# EAGLE board ISL29125 Breakout-Panel-v10 (EAGLE 6.5.0), part 1 of 2
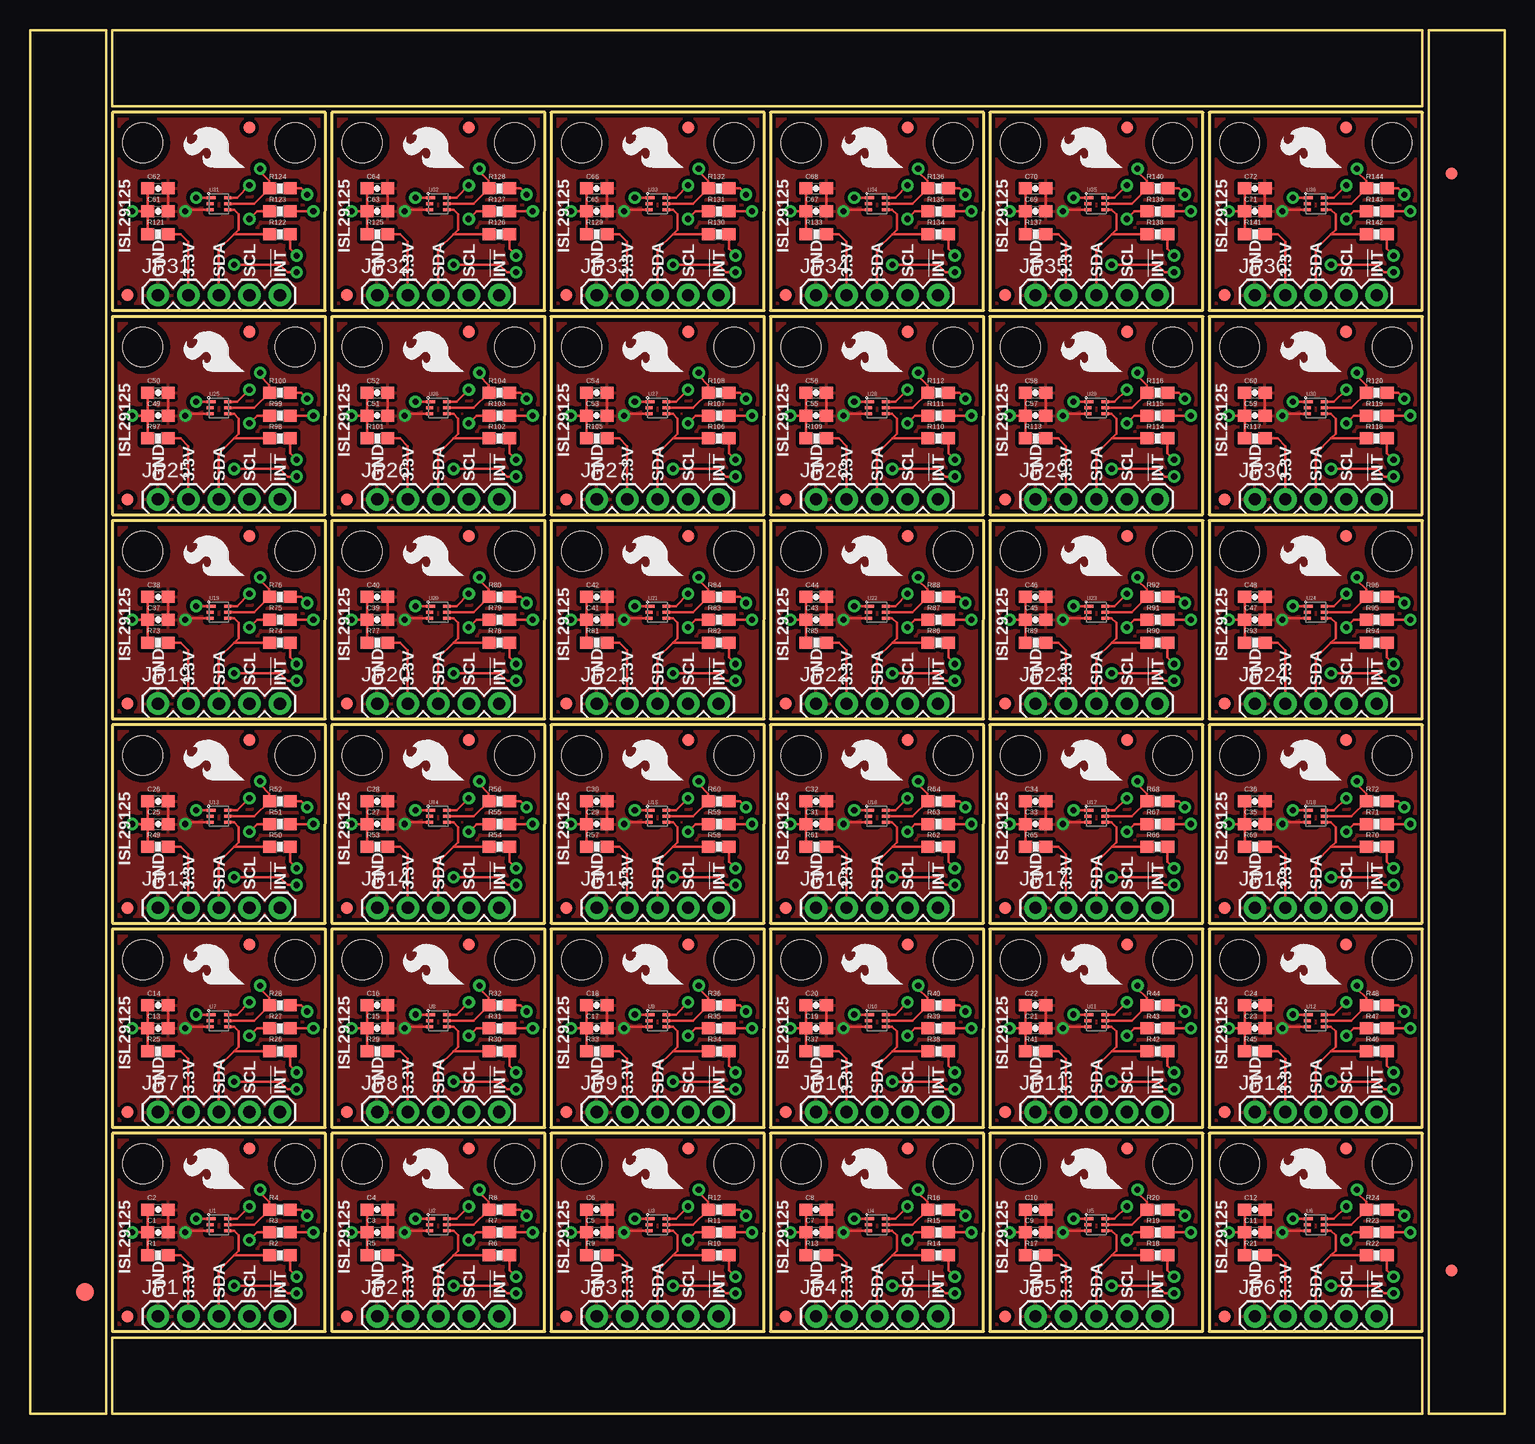
[diagram p0: board, top side]
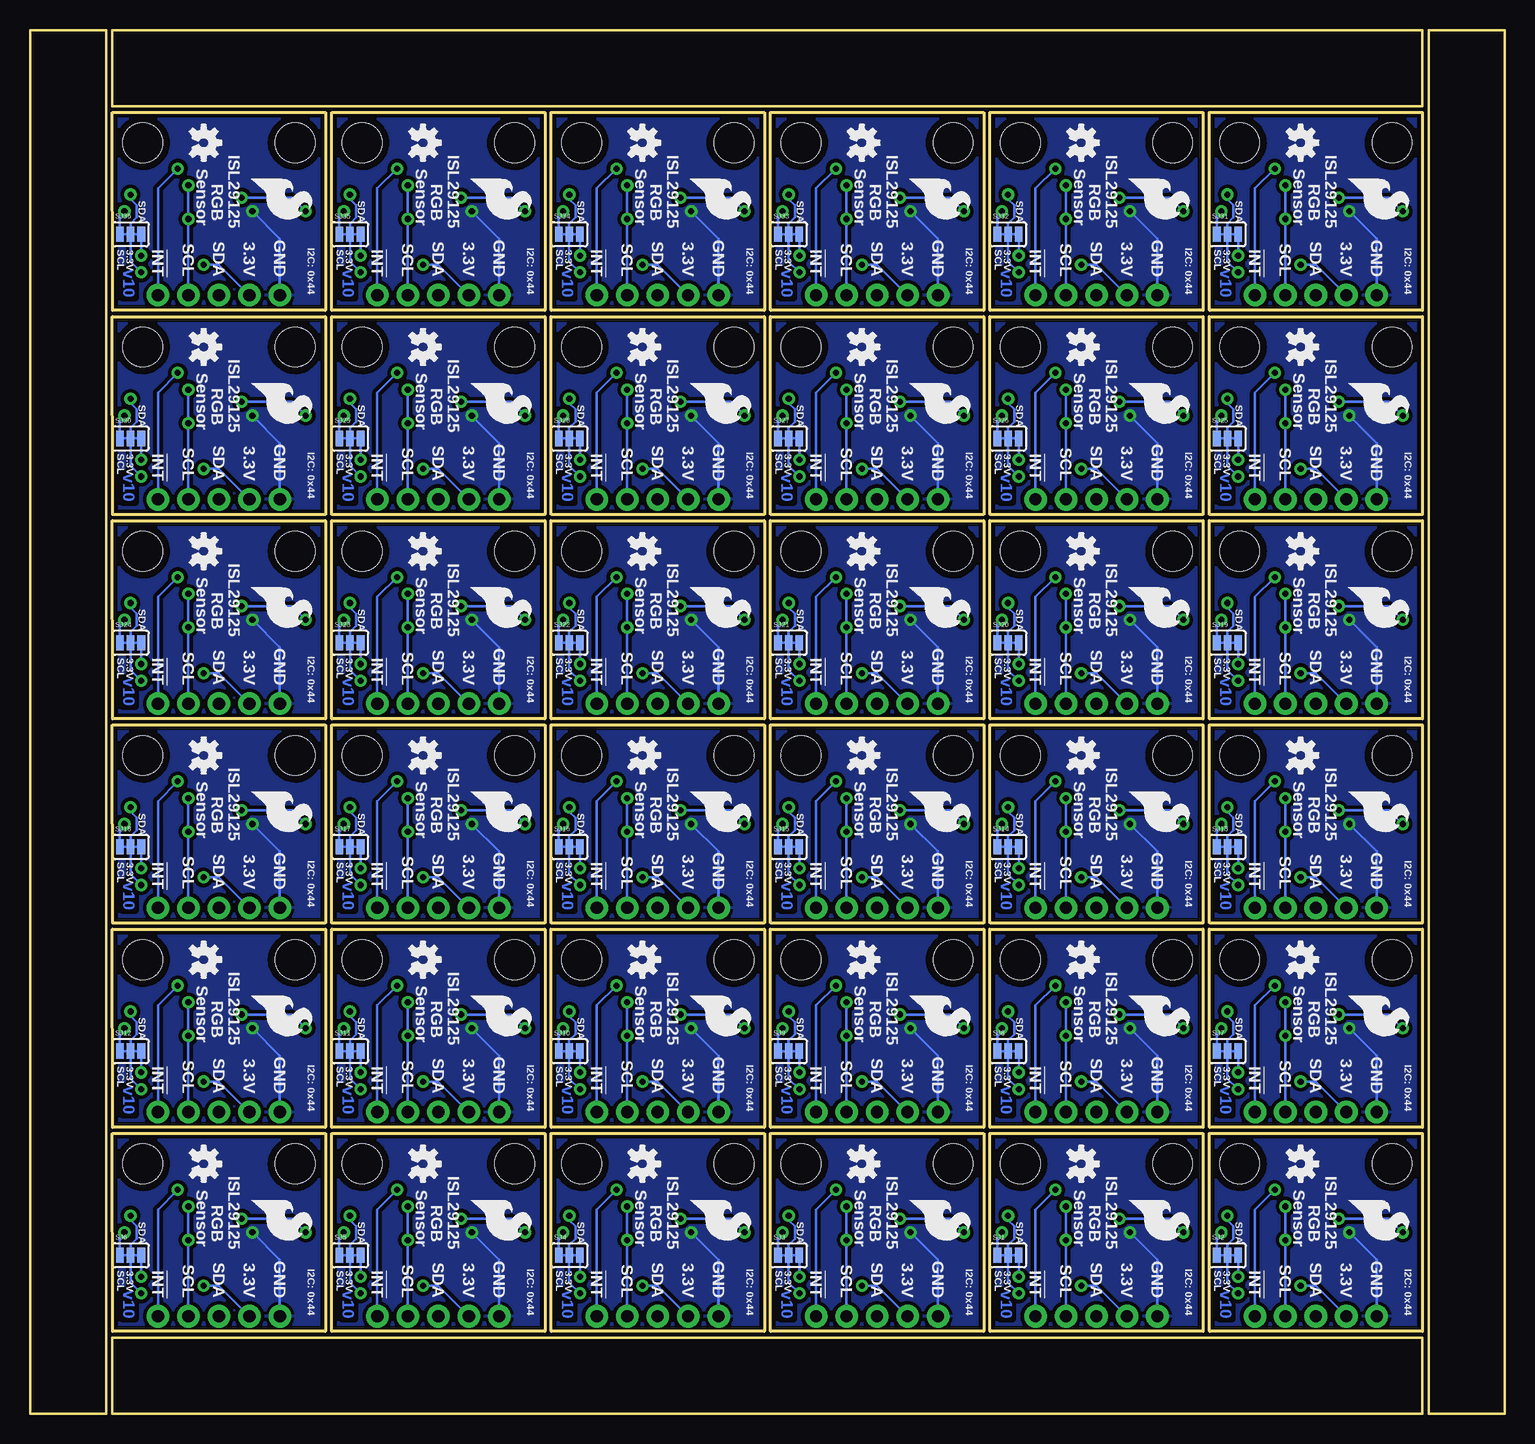
[diagram p1: board, bottom side, seen from below]

Size 122.94 x 115.32 mm. Coordinates in mm from the lower left corner, seen from the top.
Outline: 160 segments
Copper layers (1*16): Top 0.035mm / dielectric 1.5mm / Bottom 0.035mm
Design rules "SparkFun": minimum track width 8mil, minimum drill 20mil, track to track 8mil, track to pad 8mil, pad to pad 8mil, via to via 8mil, smd to smd 8mil, copper to edge 8mil, drill to drill 8mil, minimum pad ring 12mil, minimum via ring 10mil, stop-mask expansion 4mil, vias tented up to drill 20mil, thermal gap 10mil
tRestrict: area 14.7,15 to 15.7,15.1; area 33,15 to 34,15.1; area 51.3,15 to 52.3,15.1; area 69.6,15 to 70.6,15.1; area 87.9,15 to 88.9,15.1; area 106.2,15 to 107.2,15.1; area 14.7,32 to 15.7,32.1; area 33,32 to 34,32.1; area 51.3,32 to 52.3,32.1; area 69.6,32 to 70.6,32.1; area 87.9,32 to 88.9,32.1; area 106.2,32 to 107.2,32.1; 24 more areas

## Footprints (pad centres in the part's own frame; a part is rotated, then mirrored left to right if it is on the bottom)
0603-CAP = smd 1.1 x 1: 1 -0.85,0; 2 0.85,0
FIDUCIAL-1.5X3 = smd 1.5 x 1.5: 1 0,0
FIDUCIAL-1X2 = smd 1 x 1: 1 0,0
1X05 = drill 1.016 pad 1.88: 1 0,0; 2 2.54,0; 3 5.08,0; 4 7.62,0; 5 10.16,0
0603-RES = smd 1.1 x 1: 1 -0.85,0; 2 0.85,0
SJ_3 = smd 0.635 x 1.27: 1 -0.889,0; 2 0,0; 3 0.889,0
STAND-OFF = hole 3.302: 0,0
ODFN-LD-6 = smd 0.75 x 0.25: 1 -0.645,0.5 | smd 0.6 x 0.25: 2 -0.72,0; 3 -0.72,-0.5; 4 0.72,-0.5; 5 0.72,0; 6 0.72,0.5

## Placement (x,y rotation side)
C1  0.1uF  [0603-CAP]  10.67,15.11 0 top
C2  1.0uF  [0603-CAP]  10.67,17.02 0 top
C3  0.1uF  [0603-CAP]  28.96,15.11 0 top
C4  1.0uF  [0603-CAP]  28.96,17.02 0 top
C5  0.1uF  [0603-CAP]  47.24,15.11 0 top
C6  1.0uF  [0603-CAP]  47.24,17.02 0 top
C7  0.1uF  [0603-CAP]  65.53,15.11 0 top
C8  1.0uF  [0603-CAP]  65.53,17.02 0 top
C9  0.1uF  [0603-CAP]  83.82,15.11 0 top
C10  1.0uF  [0603-CAP]  83.82,17.02 0 top
C11  0.1uF  [0603-CAP]  102.11,15.11 0 top
C12  1.0uF  [0603-CAP]  102.11,17.02 0 top
C13  0.1uF  [0603-CAP]  10.67,32.13 0 top
C14  1.0uF  [0603-CAP]  10.67,34.04 0 top
C15  0.1uF  [0603-CAP]  28.96,32.13 0 top
C16  1.0uF  [0603-CAP]  28.96,34.04 0 top
C17  0.1uF  [0603-CAP]  47.24,32.13 0 top
C18  1.0uF  [0603-CAP]  47.24,34.04 0 top
C19  0.1uF  [0603-CAP]  65.53,32.13 0 top
C20  1.0uF  [0603-CAP]  65.53,34.04 0 top
C21  0.1uF  [0603-CAP]  83.82,32.13 0 top
C22  1.0uF  [0603-CAP]  83.82,34.04 0 top
C23  0.1uF  [0603-CAP]  102.11,32.13 0 top
C24  1.0uF  [0603-CAP]  102.11,34.04 0 top
C25  0.1uF  [0603-CAP]  10.67,49.15 0 top
C26  1.0uF  [0603-CAP]  10.67,51.05 0 top
C27  0.1uF  [0603-CAP]  28.96,49.15 0 top
C28  1.0uF  [0603-CAP]  28.96,51.05 0 top
C29  0.1uF  [0603-CAP]  47.24,49.15 0 top
C30  1.0uF  [0603-CAP]  47.24,51.05 0 top
C31  0.1uF  [0603-CAP]  65.53,49.15 0 top
C32  1.0uF  [0603-CAP]  65.53,51.05 0 top
C33  0.1uF  [0603-CAP]  83.82,49.15 0 top
C34  1.0uF  [0603-CAP]  83.82,51.05 0 top
C35  0.1uF  [0603-CAP]  102.11,49.15 0 top
C36  1.0uF  [0603-CAP]  102.11,51.05 0 top
C37  0.1uF  [0603-CAP]  10.67,66.17 0 top
C38  1.0uF  [0603-CAP]  10.67,68.07 0 top
C39  0.1uF  [0603-CAP]  28.96,66.17 0 top
C40  1.0uF  [0603-CAP]  28.96,68.07 0 top
C41  0.1uF  [0603-CAP]  47.24,66.17 0 top
C42  1.0uF  [0603-CAP]  47.24,68.07 0 top
C43  0.1uF  [0603-CAP]  65.53,66.17 0 top
C44  1.0uF  [0603-CAP]  65.53,68.07 0 top
C45  0.1uF  [0603-CAP]  83.82,66.17 0 top
C46  1.0uF  [0603-CAP]  83.82,68.07 0 top
C47  0.1uF  [0603-CAP]  102.11,66.17 0 top
C48  1.0uF  [0603-CAP]  102.11,68.07 0 top
C49  0.1uF  [0603-CAP]  10.67,83.19 0 top
C50  1.0uF  [0603-CAP]  10.67,85.09 0 top
C51  0.1uF  [0603-CAP]  28.96,83.19 0 top
C52  1.0uF  [0603-CAP]  28.96,85.09 0 top
C53  0.1uF  [0603-CAP]  47.24,83.19 0 top
C54  1.0uF  [0603-CAP]  47.24,85.09 0 top
C55  0.1uF  [0603-CAP]  65.53,83.19 0 top
C56  1.0uF  [0603-CAP]  65.53,85.09 0 top
C57  0.1uF  [0603-CAP]  83.82,83.19 0 top
C58  1.0uF  [0603-CAP]  83.82,85.09 0 top
C59  0.1uF  [0603-CAP]  102.11,83.19 0 top
C60  1.0uF  [0603-CAP]  102.11,85.09 0 top
C61  0.1uF  [0603-CAP]  10.67,100.2 0 top
C62  1.0uF  [0603-CAP]  10.67,102.11 0 top
C63  0.1uF  [0603-CAP]  28.96,100.2 0 top
C64  1.0uF  [0603-CAP]  28.96,102.11 0 top
C65  0.1uF  [0603-CAP]  47.24,100.2 0 top
C66  1.0uF  [0603-CAP]  47.24,102.11 0 top
C67  0.1uF  [0603-CAP]  65.53,100.2 0 top
C68  1.0uF  [0603-CAP]  65.53,102.11 0 top
C69  0.1uF  [0603-CAP]  83.82,100.2 0 top
C70  1.0uF  [0603-CAP]  83.82,102.11 0 top
C71  0.1uF  [0603-CAP]  102.11,100.2 0 top
C72  1.0uF  [0603-CAP]  102.11,102.11 0 top
E$1  [FIDUCIAL-1.5X3]  4.57,10.16 0 top
E$4  [FIDUCIAL-1X2]  118.49,11.94 0 top
E$6  [FIDUCIAL-1X2]  118.49,103.38 180 top
FID1  FIDUCIAL1X2  [FIDUCIAL-1X2]  18.29,22.1 0 top
FID2  FIDUCIAL1X2  [FIDUCIAL-1X2]  8.13,8.13 0 top
FID3  FIDUCIAL1X2  [FIDUCIAL-1X2]  36.58,22.1 0 top
FID4  FIDUCIAL1X2  [FIDUCIAL-1X2]  26.42,8.13 0 top
FID5  FIDUCIAL1X2  [FIDUCIAL-1X2]  54.86,22.1 0 top
FID6  FIDUCIAL1X2  [FIDUCIAL-1X2]  44.7,8.13 0 top
FID7  FIDUCIAL1X2  [FIDUCIAL-1X2]  73.15,22.1 0 top
FID8  FIDUCIAL1X2  [FIDUCIAL-1X2]  62.99,8.13 0 top
FID9  FIDUCIAL1X2  [FIDUCIAL-1X2]  91.44,22.1 0 top
FID10  FIDUCIAL1X2  [FIDUCIAL-1X2]  81.28,8.13 0 top
FID11  FIDUCIAL1X2  [FIDUCIAL-1X2]  109.73,22.1 0 top
FID12  FIDUCIAL1X2  [FIDUCIAL-1X2]  99.57,8.13 0 top
FID13  FIDUCIAL1X2  [FIDUCIAL-1X2]  18.29,39.12 0 top
FID14  FIDUCIAL1X2  [FIDUCIAL-1X2]  8.13,25.15 0 top
FID15  FIDUCIAL1X2  [FIDUCIAL-1X2]  36.58,39.12 0 top
FID16  FIDUCIAL1X2  [FIDUCIAL-1X2]  26.42,25.15 0 top
FID17  FIDUCIAL1X2  [FIDUCIAL-1X2]  54.86,39.12 0 top
FID18  FIDUCIAL1X2  [FIDUCIAL-1X2]  44.7,25.15 0 top
FID19  FIDUCIAL1X2  [FIDUCIAL-1X2]  73.15,39.12 0 top
FID20  FIDUCIAL1X2  [FIDUCIAL-1X2]  62.99,25.15 0 top
FID21  FIDUCIAL1X2  [FIDUCIAL-1X2]  91.44,39.12 0 top
FID22  FIDUCIAL1X2  [FIDUCIAL-1X2]  81.28,25.15 0 top
FID23  FIDUCIAL1X2  [FIDUCIAL-1X2]  109.73,39.12 0 top
FID24  FIDUCIAL1X2  [FIDUCIAL-1X2]  99.57,25.15 0 top
FID25  FIDUCIAL1X2  [FIDUCIAL-1X2]  18.29,56.13 0 top
FID26  FIDUCIAL1X2  [FIDUCIAL-1X2]  8.13,42.16 0 top
FID27  FIDUCIAL1X2  [FIDUCIAL-1X2]  36.58,56.13 0 top
FID28  FIDUCIAL1X2  [FIDUCIAL-1X2]  26.42,42.16 0 top
FID29  FIDUCIAL1X2  [FIDUCIAL-1X2]  54.86,56.13 0 top
FID30  FIDUCIAL1X2  [FIDUCIAL-1X2]  44.7,42.16 0 top
FID31  FIDUCIAL1X2  [FIDUCIAL-1X2]  73.15,56.13 0 top
FID32  FIDUCIAL1X2  [FIDUCIAL-1X2]  62.99,42.16 0 top
FID33  FIDUCIAL1X2  [FIDUCIAL-1X2]  91.44,56.13 0 top
FID34  FIDUCIAL1X2  [FIDUCIAL-1X2]  81.28,42.16 0 top
FID35  FIDUCIAL1X2  [FIDUCIAL-1X2]  109.73,56.13 0 top
FID36  FIDUCIAL1X2  [FIDUCIAL-1X2]  99.57,42.16 0 top
FID37  FIDUCIAL1X2  [FIDUCIAL-1X2]  18.29,73.15 0 top
FID38  FIDUCIAL1X2  [FIDUCIAL-1X2]  8.13,59.18 0 top
FID39  FIDUCIAL1X2  [FIDUCIAL-1X2]  36.58,73.15 0 top
FID40  FIDUCIAL1X2  [FIDUCIAL-1X2]  26.42,59.18 0 top
FID41  FIDUCIAL1X2  [FIDUCIAL-1X2]  54.86,73.15 0 top
FID42  FIDUCIAL1X2  [FIDUCIAL-1X2]  44.7,59.18 0 top
FID43  FIDUCIAL1X2  [FIDUCIAL-1X2]  73.15,73.15 0 top
FID44  FIDUCIAL1X2  [FIDUCIAL-1X2]  62.99,59.18 0 top
FID45  FIDUCIAL1X2  [FIDUCIAL-1X2]  91.44,73.15 0 top
FID46  FIDUCIAL1X2  [FIDUCIAL-1X2]  81.28,59.18 0 top
FID47  FIDUCIAL1X2  [FIDUCIAL-1X2]  109.73,73.15 0 top
FID48  FIDUCIAL1X2  [FIDUCIAL-1X2]  99.57,59.18 0 top
FID49  FIDUCIAL1X2  [FIDUCIAL-1X2]  18.29,90.17 0 top
FID50  FIDUCIAL1X2  [FIDUCIAL-1X2]  8.13,76.2 0 top
FID51  FIDUCIAL1X2  [FIDUCIAL-1X2]  36.58,90.17 0 top
FID52  FIDUCIAL1X2  [FIDUCIAL-1X2]  26.42,76.2 0 top
FID53  FIDUCIAL1X2  [FIDUCIAL-1X2]  54.86,90.17 0 top
FID54  FIDUCIAL1X2  [FIDUCIAL-1X2]  44.7,76.2 0 top
FID55  FIDUCIAL1X2  [FIDUCIAL-1X2]  73.15,90.17 0 top
FID56  FIDUCIAL1X2  [FIDUCIAL-1X2]  62.99,76.2 0 top
FID57  FIDUCIAL1X2  [FIDUCIAL-1X2]  91.44,90.17 0 top
FID58  FIDUCIAL1X2  [FIDUCIAL-1X2]  81.28,76.2 0 top
FID59  FIDUCIAL1X2  [FIDUCIAL-1X2]  109.73,90.17 0 top
FID60  FIDUCIAL1X2  [FIDUCIAL-1X2]  99.57,76.2 0 top
FID61  FIDUCIAL1X2  [FIDUCIAL-1X2]  18.29,107.19 0 top
FID62  FIDUCIAL1X2  [FIDUCIAL-1X2]  8.13,93.22 0 top
FID63  FIDUCIAL1X2  [FIDUCIAL-1X2]  36.58,107.19 0 top
FID64  FIDUCIAL1X2  [FIDUCIAL-1X2]  26.42,93.22 0 top
FID65  FIDUCIAL1X2  [FIDUCIAL-1X2]  54.86,107.19 0 top
FID66  FIDUCIAL1X2  [FIDUCIAL-1X2]  44.7,93.22 0 top
FID67  FIDUCIAL1X2  [FIDUCIAL-1X2]  73.15,107.19 0 top
FID68  FIDUCIAL1X2  [FIDUCIAL-1X2]  62.99,93.22 0 top
FID69  FIDUCIAL1X2  [FIDUCIAL-1X2]  91.44,107.19 0 top
FID70  FIDUCIAL1X2  [FIDUCIAL-1X2]  81.28,93.22 0 top
FID71  FIDUCIAL1X2  [FIDUCIAL-1X2]  109.73,107.19 0 top
FID72  FIDUCIAL1X2  [FIDUCIAL-1X2]  99.57,93.22 0 top
JP1  [1X05]  10.67,8.13 0 top
JP2  [1X05]  28.96,8.13 0 top
JP3  [1X05]  47.24,8.13 0 top
JP4  [1X05]  65.53,8.13 0 top
JP5  [1X05]  83.82,8.13 0 top
JP6  [1X05]  102.11,8.13 0 top
JP7  [1X05]  10.67,25.15 0 top
JP8  [1X05]  28.96,25.15 0 top
JP9  [1X05]  47.24,25.15 0 top
JP10  [1X05]  65.53,25.15 0 top
JP11  [1X05]  83.82,25.15 0 top
JP12  [1X05]  102.11,25.15 0 top
JP13  [1X05]  10.67,42.16 0 top
JP14  [1X05]  28.96,42.16 0 top
JP15  [1X05]  47.24,42.16 0 top
JP16  [1X05]  65.53,42.16 0 top
JP17  [1X05]  83.82,42.16 0 top
JP18  [1X05]  102.11,42.16 0 top
JP19  [1X05]  10.67,59.18 0 top
JP20  [1X05]  28.96,59.18 0 top
JP21  [1X05]  47.24,59.18 0 top
JP22  [1X05]  65.53,59.18 0 top
JP23  [1X05]  83.82,59.18 0 top
JP24  [1X05]  102.11,59.18 0 top
JP25  [1X05]  10.67,76.2 0 top
JP26  [1X05]  28.96,76.2 0 top
JP27  [1X05]  47.24,76.2 0 top
JP28  [1X05]  65.53,76.2 0 top
JP29  [1X05]  83.82,76.2 0 top
JP30  [1X05]  102.11,76.2 0 top
JP31  [1X05]  10.67,93.22 0 top
JP32  [1X05]  28.96,93.22 0 top
JP33  [1X05]  47.24,93.22 0 top
JP34  [1X05]  65.53,93.22 0 top
JP35  [1X05]  83.82,93.22 0 top
JP36  [1X05]  102.11,93.22 0 top
LOGO1  OSHW-LOGOS  [OSHW-LOGO-S]  35.31,20.83 270 bottom
LOGO2  SFE_LOGO_FLAME.2_INCH  [SFE_LOGO_FLAME_.2]  13.34,18.16 270 bottom
LOGO3  OSHW-LOGOS  [OSHW-LOGO-S]  17.02,20.83 270 bottom
LOGO4  SFE_LOGO_FLAME.2_INCH  [SFE_LOGO_FLAME_.2]  18.16,18.41 90 top
LOGO5  SFE_LOGO_FLAME.2_INCH  [SFE_LOGO_FLAME_.2]  36.45,18.41 90 top
LOGO6  SFE_LOGO_FLAME.2_INCH  [SFE_LOGO_FLAME_.2]  31.62,18.16 270 bottom
LOGO7  OSHW-LOGOS  [OSHW-LOGO-S]  53.59,20.83 270 bottom
LOGO8  SFE_LOGO_FLAME.2_INCH  [SFE_LOGO_FLAME_.2]  54.74,18.41 90 top
LOGO9  SFE_LOGO_FLAME.2_INCH  [SFE_LOGO_FLAME_.2]  49.91,18.16 270 bottom
LOGO10  OSHW-LOGOS  [OSHW-LOGO-S]  71.88,20.83 270 bottom
LOGO11  SFE_LOGO_FLAME.2_INCH  [SFE_LOGO_FLAME_.2]  73.03,18.41 90 top
LOGO12  SFE_LOGO_FLAME.2_INCH  [SFE_LOGO_FLAME_.2]  68.2,18.16 270 bottom
LOGO13  OSHW-LOGOS  [OSHW-LOGO-S]  90.17,20.83 270 bottom
LOGO14  SFE_LOGO_FLAME.2_INCH  [SFE_LOGO_FLAME_.2]  91.31,18.41 90 top
LOGO15  SFE_LOGO_FLAME.2_INCH  [SFE_LOGO_FLAME_.2]  86.49,18.16 270 bottom
LOGO16  OSHW-LOGOS  [OSHW-LOGO-S]  108.46,20.83 270 bottom
LOGO17  SFE_LOGO_FLAME.2_INCH  [SFE_LOGO_FLAME_.2]  109.6,18.41 90 top
LOGO18  SFE_LOGO_FLAME.2_INCH  [SFE_LOGO_FLAME_.2]  104.78,18.16 270 bottom
LOGO19  OSHW-LOGOS  [OSHW-LOGO-S]  17.02,37.85 270 bottom
LOGO20  SFE_LOGO_FLAME.2_INCH  [SFE_LOGO_FLAME_.2]  18.16,35.43 90 top
LOGO21  SFE_LOGO_FLAME.2_INCH  [SFE_LOGO_FLAME_.2]  13.34,35.18 270 bottom
LOGO22  OSHW-LOGOS  [OSHW-LOGO-S]  35.31,37.85 270 bottom
LOGO23  SFE_LOGO_FLAME.2_INCH  [SFE_LOGO_FLAME_.2]  36.45,35.43 90 top
LOGO24  SFE_LOGO_FLAME.2_INCH  [SFE_LOGO_FLAME_.2]  31.62,35.18 270 bottom
LOGO25  OSHW-LOGOS  [OSHW-LOGO-S]  53.59,37.85 270 bottom
LOGO26  SFE_LOGO_FLAME.2_INCH  [SFE_LOGO_FLAME_.2]  54.74,35.43 90 top
LOGO27  SFE_LOGO_FLAME.2_INCH  [SFE_LOGO_FLAME_.2]  49.91,35.18 270 bottom
LOGO28  OSHW-LOGOS  [OSHW-LOGO-S]  71.88,37.85 270 bottom
LOGO29  SFE_LOGO_FLAME.2_INCH  [SFE_LOGO_FLAME_.2]  73.03,35.43 90 top
LOGO30  SFE_LOGO_FLAME.2_INCH  [SFE_LOGO_FLAME_.2]  68.2,35.18 270 bottom
LOGO31  OSHW-LOGOS  [OSHW-LOGO-S]  90.17,37.85 270 bottom
LOGO32  SFE_LOGO_FLAME.2_INCH  [SFE_LOGO_FLAME_.2]  91.31,35.43 90 top
LOGO33  SFE_LOGO_FLAME.2_INCH  [SFE_LOGO_FLAME_.2]  86.49,35.18 270 bottom
LOGO34  OSHW-LOGOS  [OSHW-LOGO-S]  108.46,37.85 270 bottom
LOGO35  SFE_LOGO_FLAME.2_INCH  [SFE_LOGO_FLAME_.2]  109.6,35.43 90 top
LOGO36  SFE_LOGO_FLAME.2_INCH  [SFE_LOGO_FLAME_.2]  104.78,35.18 270 bottom
LOGO37  OSHW-LOGOS  [OSHW-LOGO-S]  17.02,54.86 270 bottom
LOGO38  SFE_LOGO_FLAME.2_INCH  [SFE_LOGO_FLAME_.2]  18.16,52.45 90 top
LOGO39  SFE_LOGO_FLAME.2_INCH  [SFE_LOGO_FLAME_.2]  13.34,52.2 270 bottom
LOGO40  OSHW-LOGOS  [OSHW-LOGO-S]  35.31,54.86 270 bottom
LOGO41  SFE_LOGO_FLAME.2_INCH  [SFE_LOGO_FLAME_.2]  36.45,52.45 90 top
LOGO42  SFE_LOGO_FLAME.2_INCH  [SFE_LOGO_FLAME_.2]  31.62,52.2 270 bottom
LOGO43  OSHW-LOGOS  [OSHW-LOGO-S]  53.59,54.86 270 bottom
LOGO44  SFE_LOGO_FLAME.2_INCH  [SFE_LOGO_FLAME_.2]  54.74,52.45 90 top
LOGO45  SFE_LOGO_FLAME.2_INCH  [SFE_LOGO_FLAME_.2]  49.91,52.2 270 bottom
LOGO46  OSHW-LOGOS  [OSHW-LOGO-S]  71.88,54.86 270 bottom
LOGO47  SFE_LOGO_FLAME.2_INCH  [SFE_LOGO_FLAME_.2]  73.03,52.45 90 top
LOGO48  SFE_LOGO_FLAME.2_INCH  [SFE_LOGO_FLAME_.2]  68.2,52.2 270 bottom
LOGO49  OSHW-LOGOS  [OSHW-LOGO-S]  90.17,54.86 270 bottom
LOGO50  SFE_LOGO_FLAME.2_INCH  [SFE_LOGO_FLAME_.2]  91.31,52.45 90 top
LOGO51  SFE_LOGO_FLAME.2_INCH  [SFE_LOGO_FLAME_.2]  86.49,52.2 270 bottom
LOGO52  OSHW-LOGOS  [OSHW-LOGO-S]  108.46,54.86 270 bottom
LOGO53  SFE_LOGO_FLAME.2_INCH  [SFE_LOGO_FLAME_.2]  109.6,52.45 90 top
LOGO54  SFE_LOGO_FLAME.2_INCH  [SFE_LOGO_FLAME_.2]  104.78,52.2 270 bottom
LOGO55  OSHW-LOGOS  [OSHW-LOGO-S]  17.02,71.88 270 bottom
LOGO56  SFE_LOGO_FLAME.2_INCH  [SFE_LOGO_FLAME_.2]  18.16,69.47 90 top
LOGO57  SFE_LOGO_FLAME.2_INCH  [SFE_LOGO_FLAME_.2]  13.34,69.22 270 bottom
LOGO58  OSHW-LOGOS  [OSHW-LOGO-S]  35.31,71.88 270 bottom
LOGO59  SFE_LOGO_FLAME.2_INCH  [SFE_LOGO_FLAME_.2]  36.45,69.47 90 top
LOGO60  SFE_LOGO_FLAME.2_INCH  [SFE_LOGO_FLAME_.2]  31.62,69.22 270 bottom
LOGO61  OSHW-LOGOS  [OSHW-LOGO-S]  53.59,71.88 270 bottom
LOGO62  SFE_LOGO_FLAME.2_INCH  [SFE_LOGO_FLAME_.2]  54.74,69.47 90 top
LOGO63  SFE_LOGO_FLAME.2_INCH  [SFE_LOGO_FLAME_.2]  49.91,69.22 270 bottom
LOGO64  OSHW-LOGOS  [OSHW-LOGO-S]  71.88,71.88 270 bottom
LOGO65  SFE_LOGO_FLAME.2_INCH  [SFE_LOGO_FLAME_.2]  73.03,69.47 90 top
LOGO66  SFE_LOGO_FLAME.2_INCH  [SFE_LOGO_FLAME_.2]  68.2,69.22 270 bottom
LOGO67  OSHW-LOGOS  [OSHW-LOGO-S]  90.17,71.88 270 bottom
LOGO68  SFE_LOGO_FLAME.2_INCH  [SFE_LOGO_FLAME_.2]  91.31,69.47 90 top
LOGO69  SFE_LOGO_FLAME.2_INCH  [SFE_LOGO_FLAME_.2]  86.49,69.22 270 bottom
LOGO70  OSHW-LOGOS  [OSHW-LOGO-S]  108.46,71.88 270 bottom
LOGO71  SFE_LOGO_FLAME.2_INCH  [SFE_LOGO_FLAME_.2]  109.6,69.47 90 top
LOGO72  SFE_LOGO_FLAME.2_INCH  [SFE_LOGO_FLAME_.2]  104.78,69.22 270 bottom
LOGO73  OSHW-LOGOS  [OSHW-LOGO-S]  17.02,88.9 270 bottom
LOGO74  SFE_LOGO_FLAME.2_INCH  [SFE_LOGO_FLAME_.2]  18.16,86.49 90 top
LOGO75  SFE_LOGO_FLAME.2_INCH  [SFE_LOGO_FLAME_.2]  13.34,86.23 270 bottom
LOGO76  OSHW-LOGOS  [OSHW-LOGO-S]  35.31,88.9 270 bottom
LOGO77  SFE_LOGO_FLAME.2_INCH  [SFE_LOGO_FLAME_.2]  36.45,86.49 90 top
LOGO78  SFE_LOGO_FLAME.2_INCH  [SFE_LOGO_FLAME_.2]  31.62,86.23 270 bottom
LOGO79  OSHW-LOGOS  [OSHW-LOGO-S]  53.59,88.9 270 bottom
LOGO80  SFE_LOGO_FLAME.2_INCH  [SFE_LOGO_FLAME_.2]  54.74,86.49 90 top
LOGO81  SFE_LOGO_FLAME.2_INCH  [SFE_LOGO_FLAME_.2]  49.91,86.23 270 bottom
LOGO82  OSHW-LOGOS  [OSHW-LOGO-S]  71.88,88.9 270 bottom
LOGO83  SFE_LOGO_FLAME.2_INCH  [SFE_LOGO_FLAME_.2]  73.03,86.49 90 top
LOGO84  SFE_LOGO_FLAME.2_INCH  [SFE_LOGO_FLAME_.2]  68.2,86.23 270 bottom
LOGO85  OSHW-LOGOS  [OSHW-LOGO-S]  90.17,88.9 270 bottom
LOGO86  SFE_LOGO_FLAME.2_INCH  [SFE_LOGO_FLAME_.2]  91.31,86.49 90 top
LOGO87  SFE_LOGO_FLAME.2_INCH  [SFE_LOGO_FLAME_.2]  86.49,86.23 270 bottom
LOGO88  OSHW-LOGOS  [OSHW-LOGO-S]  108.46,88.9 270 bottom
LOGO89  SFE_LOGO_FLAME.2_INCH  [SFE_LOGO_FLAME_.2]  109.6,86.49 90 top
LOGO90  SFE_LOGO_FLAME.2_INCH  [SFE_LOGO_FLAME_.2]  104.78,86.23 270 bottom
LOGO91  OSHW-LOGOS  [OSHW-LOGO-S]  17.02,105.92 270 bottom
LOGO92  SFE_LOGO_FLAME.2_INCH  [SFE_LOGO_FLAME_.2]  18.16,103.5 90 top
LOGO93  SFE_LOGO_FLAME.2_INCH  [SFE_LOGO_FLAME_.2]  13.34,103.25 270 bottom
LOGO94  OSHW-LOGOS  [OSHW-LOGO-S]  35.31,105.92 270 bottom
LOGO95  SFE_LOGO_FLAME.2_INCH  [SFE_LOGO_FLAME_.2]  36.45,103.5 90 top
LOGO96  SFE_LOGO_FLAME.2_INCH  [SFE_LOGO_FLAME_.2]  31.62,103.25 270 bottom
LOGO97  OSHW-LOGOS  [OSHW-LOGO-S]  53.59,105.92 270 bottom
LOGO98  SFE_LOGO_FLAME.2_INCH  [SFE_LOGO_FLAME_.2]  54.74,103.5 90 top
LOGO99  SFE_LOGO_FLAME.2_INCH  [SFE_LOGO_FLAME_.2]  49.91,103.25 270 bottom
LOGO100  OSHW-LOGOS  [OSHW-LOGO-S]  71.88,105.92 270 bottom
LOGO101  SFE_LOGO_FLAME.2_INCH  [SFE_LOGO_FLAME_.2]  73.03,103.5 90 top
LOGO102  SFE_LOGO_FLAME.2_INCH  [SFE_LOGO_FLAME_.2]  68.2,103.25 270 bottom
LOGO103  OSHW-LOGOS  [OSHW-LOGO-S]  90.17,105.92 270 bottom
LOGO104  SFE_LOGO_FLAME.2_INCH  [SFE_LOGO_FLAME_.2]  91.31,103.5 90 top
LOGO105  SFE_LOGO_FLAME.2_INCH  [SFE_LOGO_FLAME_.2]  86.49,103.25 270 bottom
LOGO106  OSHW-LOGOS  [OSHW-LOGO-S]  108.46,105.92 270 bottom
LOGO107  SFE_LOGO_FLAME.2_INCH  [SFE_LOGO_FLAME_.2]  109.6,103.5 90 top
LOGO108  SFE_LOGO_FLAME.2_INCH  [SFE_LOGO_FLAME_.2]  104.78,103.25 270 bottom
R1  100  [0603-RES]  10.67,13.21 0 top
R2  10K  [0603-RES]  20.83,13.21 0 top
R3  10K  [0603-RES]  20.83,15.11 0 top
R4  10K  [0603-RES]  20.83,17.02 0 top
R5  100  [0603-RES]  28.96,13.21 0 top
R6  10K  [0603-RES]  39.12,13.21 0 top
R7  10K  [0603-RES]  39.12,15.11 0 top
R8  10K  [0603-RES]  39.12,17.02 0 top
R9  100  [0603-RES]  47.24,13.21 0 top
R10  10K  [0603-RES]  57.4,13.21 0 top
R11  10K  [0603-RES]  57.4,15.11 0 top
R12  10K  [0603-RES]  57.4,17.02 0 top
R13  100  [0603-RES]  65.53,13.21 0 top
R14  10K  [0603-RES]  75.69,13.21 0 top
R15  10K  [0603-RES]  75.69,15.11 0 top
R16  10K  [0603-RES]  75.69,17.02 0 top
R17  100  [0603-RES]  83.82,13.21 0 top
R18  10K  [0603-RES]  93.98,13.21 0 top
R19  10K  [0603-RES]  93.98,15.11 0 top
R20  10K  [0603-RES]  93.98,17.02 0 top
R21  100  [0603-RES]  102.11,13.21 0 top
R22  10K  [0603-RES]  112.27,13.21 0 top
R23  10K  [0603-RES]  112.27,15.11 0 top
R24  10K  [0603-RES]  112.27,17.02 0 top
R25  100  [0603-RES]  10.67,30.23 0 top
R26  10K  [0603-RES]  20.83,30.23 0 top
R27  10K  [0603-RES]  20.83,32.13 0 top
R28  10K  [0603-RES]  20.83,34.04 0 top
R29  100  [0603-RES]  28.96,30.23 0 top
R30  10K  [0603-RES]  39.12,30.23 0 top
R31  10K  [0603-RES]  39.12,32.13 0 top
R32  10K  [0603-RES]  39.12,34.04 0 top
R33  100  [0603-RES]  47.24,30.23 0 top
R34  10K  [0603-RES]  57.4,30.23 0 top
R35  10K  [0603-RES]  57.4,32.13 0 top
R36  10K  [0603-RES]  57.4,34.04 0 top
R37  100  [0603-RES]  65.53,30.23 0 top
R38  10K  [0603-RES]  75.69,30.23 0 top
R39  10K  [0603-RES]  75.69,32.13 0 top
R40  10K  [0603-RES]  75.69,34.04 0 top
R41  100  [0603-RES]  83.82,30.23 0 top
R42  10K  [0603-RES]  93.98,30.23 0 top
R43  10K  [0603-RES]  93.98,32.13 0 top
R44  10K  [0603-RES]  93.98,34.04 0 top
R45  100  [0603-RES]  102.11,30.23 0 top
R46  10K  [0603-RES]  112.27,30.23 0 top
R47  10K  [0603-RES]  112.27,32.13 0 top
R48  10K  [0603-RES]  112.27,34.04 0 top
R49  100  [0603-RES]  10.67,47.24 0 top
R50  10K  [0603-RES]  20.83,47.24 0 top
R51  10K  [0603-RES]  20.83,49.15 0 top
R52  10K  [0603-RES]  20.83,51.05 0 top
R53  100  [0603-RES]  28.96,47.24 0 top
R54  10K  [0603-RES]  39.12,47.24 0 top
R55  10K  [0603-RES]  39.12,49.15 0 top
R56  10K  [0603-RES]  39.12,51.05 0 top
R57  100  [0603-RES]  47.24,47.24 0 top
R58  10K  [0603-RES]  57.4,47.24 0 top
R59  10K  [0603-RES]  57.4,49.15 0 top
R60  10K  [0603-RES]  57.4,51.05 0 top
R61  100  [0603-RES]  65.53,47.24 0 top
R62  10K  [0603-RES]  75.69,47.24 0 top
R63  10K  [0603-RES]  75.69,49.15 0 top
R64  10K  [0603-RES]  75.69,51.05 0 top
R65  100  [0603-RES]  83.82,47.24 0 top
R66  10K  [0603-RES]  93.98,47.24 0 top
R67  10K  [0603-RES]  93.98,49.15 0 top
R68  10K  [0603-RES]  93.98,51.05 0 top
R69  100  [0603-RES]  102.11,47.24 0 top
R70  10K  [0603-RES]  112.27,47.24 0 top
R71  10K  [0603-RES]  112.27,49.15 0 top
R72  10K  [0603-RES]  112.27,51.05 0 top
R73  100  [0603-RES]  10.67,64.26 0 top
R74  10K  [0603-RES]  20.83,64.26 0 top
R75  10K  [0603-RES]  20.83,66.17 0 top
R76  10K  [0603-RES]  20.83,68.07 0 top
R77  100  [0603-RES]  28.96,64.26 0 top
R78  10K  [0603-RES]  39.12,64.26 0 top
R79  10K  [0603-RES]  39.12,66.17 0 top
R80  10K  [0603-RES]  39.12,68.07 0 top
R81  100  [0603-RES]  47.24,64.26 0 top
R82  10K  [0603-RES]  57.4,64.26 0 top
R83  10K  [0603-RES]  57.4,66.17 0 top
R84  10K  [0603-RES]  57.4,68.07 0 top
R85  100  [0603-RES]  65.53,64.26 0 top
R86  10K  [0603-RES]  75.69,64.26 0 top
R87  10K  [0603-RES]  75.69,66.17 0 top
R88  10K  [0603-RES]  75.69,68.07 0 top
R89  100  [0603-RES]  83.82,64.26 0 top
R90  10K  [0603-RES]  93.98,64.26 0 top
R91  10K  [0603-RES]  93.98,66.17 0 top
R92  10K  [0603-RES]  93.98,68.07 0 top
R93  100  [0603-RES]  102.11,64.26 0 top
R94  10K  [0603-RES]  112.27,64.26 0 top
R95  10K  [0603-RES]  112.27,66.17 0 top
R96  10K  [0603-RES]  112.27,68.07 0 top
R97  100  [0603-RES]  10.67,81.28 0 top
R98  10K  [0603-RES]  20.83,81.28 0 top
R99  10K  [0603-RES]  20.83,83.19 0 top
R100  10K  [0603-RES]  20.83,85.09 0 top
R101  100  [0603-RES]  28.96,81.28 0 top
R102  10K  [0603-RES]  39.12,81.28 0 top
R103  10K  [0603-RES]  39.12,83.19 0 top
R104  10K  [0603-RES]  39.12,85.09 0 top
R105  100  [0603-RES]  47.24,81.28 0 top
R106  10K  [0603-RES]  57.4,81.28 0 top
R107  10K  [0603-RES]  57.4,83.19 0 top
R108  10K  [0603-RES]  57.4,85.09 0 top
R109  100  [0603-RES]  65.53,81.28 0 top
R110  10K  [0603-RES]  75.69,81.28 0 top
R111  10K  [0603-RES]  75.69,83.19 0 top
R112  10K  [0603-RES]  75.69,85.09 0 top
R113  100  [0603-RES]  83.82,81.28 0 top
R114  10K  [0603-RES]  93.98,81.28 0 top
R115  10K  [0603-RES]  93.98,83.19 0 top
R116  10K  [0603-RES]  93.98,85.09 0 top
R117  100  [0603-RES]  102.11,81.28 0 top
R118  10K  [0603-RES]  112.27,81.28 0 top
R119  10K  [0603-RES]  112.27,83.19 0 top
R120  10K  [0603-RES]  112.27,85.09 0 top
R121  100  [0603-RES]  10.67,98.3 0 top
R122  10K  [0603-RES]  20.83,98.3 0 top
R123  10K  [0603-RES]  20.83,100.2 0 top
R124  10K  [0603-RES]  20.83,102.11 0 top
R125  100  [0603-RES]  28.96,98.3 0 top
R126  10K  [0603-RES]  39.12,98.3 0 top
R127  10K  [0603-RES]  39.12,100.2 0 top
R128  10K  [0603-RES]  39.12,102.11 0 top
R129  100  [0603-RES]  47.24,98.3 0 top
R130  10K  [0603-RES]  57.4,98.3 0 top
R131  10K  [0603-RES]  57.4,100.2 0 top
R132  10K  [0603-RES]  57.4,102.11 0 top
R133  100  [0603-RES]  65.53,98.3 0 top
R134  10K  [0603-RES]  75.69,98.3 0 top
R135  10K  [0603-RES]  75.69,100.2 0 top
R136  10K  [0603-RES]  75.69,102.11 0 top
R137  100  [0603-RES]  83.82,98.3 0 top
R138  10K  [0603-RES]  93.98,98.3 0 top
R139  10K  [0603-RES]  93.98,100.2 0 top
R140  10K  [0603-RES]  93.98,102.11 0 top
R141  100  [0603-RES]  102.11,98.3 0 top
R142  10K  [0603-RES]  112.27,98.3 0 top
R143  10K  [0603-RES]  112.27,100.2 0 top
R144  10K  [0603-RES]  112.27,102.11 0 top
SJ1  [SJ_3]  41.4,13.21 0 bottom
SJ2  [SJ_3]  23.11,13.21 0 bottom
SJ3  [SJ_3]  59.69,13.21 0 bottom
SJ4  [SJ_3]  77.98,13.21 0 bottom
SJ5  [SJ_3]  96.27,13.21 0 bottom
SJ6  [SJ_3]  114.55,13.21 0 bottom
SJ7  [SJ_3]  23.11,30.23 0 bottom
SJ8  [SJ_3]  41.4,30.23 0 bottom
SJ9  [SJ_3]  59.69,30.23 0 bottom
SJ10  [SJ_3]  77.98,30.23 0 bottom
SJ11  [SJ_3]  96.27,30.23 0 bottom
SJ12  [SJ_3]  114.55,30.23 0 bottom
SJ13  [SJ_3]  23.11,47.24 0 bottom
SJ14  [SJ_3]  41.4,47.24 0 bottom
SJ15  [SJ_3]  59.69,47.24 0 bottom
SJ16  [SJ_3]  77.98,47.24 0 bottom
SJ17  [SJ_3]  96.27,47.24 0 bottom
SJ18  [SJ_3]  114.55,47.24 0 bottom
SJ19  [SJ_3]  23.11,64.26 0 bottom
SJ20  [SJ_3]  41.4,64.26 0 bottom
SJ21  [SJ_3]  59.69,64.26 0 bottom
SJ22  [SJ_3]  77.98,64.26 0 bottom
SJ23  [SJ_3]  96.27,64.26 0 bottom
SJ24  [SJ_3]  114.55,64.26 0 bottom
SJ25  [SJ_3]  23.11,81.28 0 bottom
SJ26  [SJ_3]  41.4,81.28 0 bottom
SJ27  [SJ_3]  59.69,81.28 0 bottom
SJ28  [SJ_3]  77.98,81.28 0 bottom
SJ29  [SJ_3]  96.27,81.28 0 bottom
SJ30  [SJ_3]  114.55,81.28 0 bottom
SJ31  [SJ_3]  23.11,98.3 0 bottom
SJ32  [SJ_3]  41.4,98.3 0 bottom
SJ33  [SJ_3]  59.69,98.3 0 bottom
SJ34  [SJ_3]  77.98,98.3 0 bottom
SJ35  [SJ_3]  96.27,98.3 0 bottom
SJ36  [SJ_3]  114.55,98.3 0 bottom
STANDOFF1  STAND-OFF  [STAND-OFF]  9.4,20.83 0 top
STANDOFF2  STAND-OFF  [STAND-OFF]  22.1,20.83 0 top
STANDOFF3  STAND-OFF  [STAND-OFF]  27.69,20.83 0 top
STANDOFF4  STAND-OFF  [STAND-OFF]  40.39,20.83 0 top
STANDOFF5  STAND-OFF  [STAND-OFF]  45.97,20.83 0 top
STANDOFF6  STAND-OFF  [STAND-OFF]  58.67,20.83 0 top
STANDOFF7  STAND-OFF  [STAND-OFF]  64.26,20.83 0 top
STANDOFF8  STAND-OFF  [STAND-OFF]  76.96,20.83 0 top
STANDOFF9  STAND-OFF  [STAND-OFF]  82.55,20.83 0 top
STANDOFF10  STAND-OFF  [STAND-OFF]  95.25,20.83 0 top
STANDOFF11  STAND-OFF  [STAND-OFF]  100.84,20.83 0 top
STANDOFF12  STAND-OFF  [STAND-OFF]  113.54,20.83 0 top
STANDOFF13  STAND-OFF  [STAND-OFF]  9.4,37.85 0 top
STANDOFF14  STAND-OFF  [STAND-OFF]  22.1,37.85 0 top
STANDOFF15  STAND-OFF  [STAND-OFF]  27.69,37.85 0 top
STANDOFF16  STAND-OFF  [STAND-OFF]  40.39,37.85 0 top
STANDOFF17  STAND-OFF  [STAND-OFF]  45.97,37.85 0 top
STANDOFF18  STAND-OFF  [STAND-OFF]  58.67,37.85 0 top
STANDOFF19  STAND-OFF  [STAND-OFF]  64.26,37.85 0 top
STANDOFF20  STAND-OFF  [STAND-OFF]  76.96,37.85 0 top
STANDOFF21  STAND-OFF  [STAND-OFF]  82.55,37.85 0 top
STANDOFF22  STAND-OFF  [STAND-OFF]  95.25,37.85 0 top
STANDOFF23  STAND-OFF  [STAND-OFF]  100.84,37.85 0 top
STANDOFF24  STAND-OFF  [STAND-OFF]  113.54,37.85 0 top
STANDOFF25  STAND-OFF  [STAND-OFF]  9.4,54.86 0 top
STANDOFF26  STAND-OFF  [STAND-OFF]  22.1,54.86 0 top
STANDOFF27  STAND-OFF  [STAND-OFF]  27.69,54.86 0 top
STANDOFF28  STAND-OFF  [STAND-OFF]  40.39,54.86 0 top
STANDOFF29  STAND-OFF  [STAND-OFF]  45.97,54.86 0 top
STANDOFF30  STAND-OFF  [STAND-OFF]  58.67,54.86 0 top
STANDOFF31  STAND-OFF  [STAND-OFF]  64.26,54.86 0 top
STANDOFF32  STAND-OFF  [STAND-OFF]  76.96,54.86 0 top
STANDOFF33  STAND-OFF  [STAND-OFF]  82.55,54.86 0 top
STANDOFF34  STAND-OFF  [STAND-OFF]  95.25,54.86 0 top
STANDOFF35  STAND-OFF  [STAND-OFF]  100.84,54.86 0 top
STANDOFF36  STAND-OFF  [STAND-OFF]  113.54,54.86 0 top
STANDOFF37  STAND-OFF  [STAND-OFF]  9.4,71.88 0 top
STANDOFF38  STAND-OFF  [STAND-OFF]  22.1,71.88 0 top
STANDOFF39  STAND-OFF  [STAND-OFF]  27.69,71.88 0 top
STANDOFF40  STAND-OFF  [STAND-OFF]  40.39,71.88 0 top
STANDOFF41  STAND-OFF  [STAND-OFF]  45.97,71.88 0 top
STANDOFF42  STAND-OFF  [STAND-OFF]  58.67,71.88 0 top
STANDOFF43  STAND-OFF  [STAND-OFF]  64.26,71.88 0 top
STANDOFF44  STAND-OFF  [STAND-OFF]  76.96,71.88 0 top
STANDOFF45  STAND-OFF  [STAND-OFF]  82.55,71.88 0 top
STANDOFF46  STAND-OFF  [STAND-OFF]  95.25,71.88 0 top
STANDOFF47  STAND-OFF  [STAND-OFF]  100.84,71.88 0 top
STANDOFF48  STAND-OFF  [STAND-OFF]  113.54,71.88 0 top
STANDOFF49  STAND-OFF  [STAND-OFF]  9.4,88.9 0 top
STANDOFF50  STAND-OFF  [STAND-OFF]  22.1,88.9 0 top
STANDOFF51  STAND-OFF  [STAND-OFF]  27.69,88.9 0 top
STANDOFF52  STAND-OFF  [STAND-OFF]  40.39,88.9 0 top
STANDOFF53  STAND-OFF  [STAND-OFF]  45.97,88.9 0 top
STANDOFF54  STAND-OFF  [STAND-OFF]  58.67,88.9 0 top
STANDOFF55  STAND-OFF  [STAND-OFF]  64.26,88.9 0 top
STANDOFF56  STAND-OFF  [STAND-OFF]  76.96,88.9 0 top
STANDOFF57  STAND-OFF  [STAND-OFF]  82.55,88.9 0 top
STANDOFF58  STAND-OFF  [STAND-OFF]  95.25,88.9 0 top
STANDOFF59  STAND-OFF  [STAND-OFF]  100.84,88.9 0 top
STANDOFF60  STAND-OFF  [STAND-OFF]  113.54,88.9 0 top
STANDOFF61  STAND-OFF  [STAND-OFF]  9.4,105.92 0 top
STANDOFF62  STAND-OFF  [STAND-OFF]  22.1,105.92 0 top
STANDOFF63  STAND-OFF  [STAND-OFF]  27.69,105.92 0 top
STANDOFF64  STAND-OFF  [STAND-OFF]  40.39,105.92 0 top
STANDOFF65  STAND-OFF  [STAND-OFF]  45.97,105.92 0 top
STANDOFF66  STAND-OFF  [STAND-OFF]  58.67,105.92 0 top
STANDOFF67  STAND-OFF  [STAND-OFF]  64.26,105.92 0 top
STANDOFF68  STAND-OFF  [STAND-OFF]  76.96,105.92 0 top
STANDOFF69  STAND-OFF  [STAND-OFF]  82.55,105.92 0 top
STANDOFF70  STAND-OFF  [STAND-OFF]  95.25,105.92 0 top
STANDOFF71  STAND-OFF  [STAND-OFF]  100.84,105.92 0 top
STANDOFF72  STAND-OFF  [STAND-OFF]  113.54,105.92 0 top
U1  ISL29125  [ODFN-LD-6]  15.75,15.75 0 top
U2  ISL29125  [ODFN-LD-6]  34.04,15.75 0 top
U3  ISL29125  [ODFN-LD-6]  52.32,15.75 0 top
U4  ISL29125  [ODFN-LD-6]  70.61,15.75 0 top
U5  ISL29125  [ODFN-LD-6]  88.9,15.75 0 top
U6  ISL29125  [ODFN-LD-6]  107.19,15.75 0 top
U7  ISL29125  [ODFN-LD-6]  15.75,32.77 0 top
U8  ISL29125  [ODFN-LD-6]  34.04,32.77 0 top
U9  ISL29125  [ODFN-LD-6]  52.32,32.77 0 top
U10  ISL29125  [ODFN-LD-6]  70.61,32.77 0 top
U11  ISL29125  [ODFN-LD-6]  88.9,32.77 0 top
U12  ISL29125  [ODFN-LD-6]  107.19,32.77 0 top
U13  ISL29125  [ODFN-LD-6]  15.75,49.78 0 top
U14  ISL29125  [ODFN-LD-6]  34.04,49.78 0 top
U15  ISL29125  [ODFN-LD-6]  52.32,49.78 0 top
U16  ISL29125  [ODFN-LD-6]  70.61,49.78 0 top
U17  ISL29125  [ODFN-LD-6]  88.9,49.78 0 top
U18  ISL29125  [ODFN-LD-6]  107.19,49.78 0 top
U19  ISL29125  [ODFN-LD-6]  15.75,66.8 0 top
U20  ISL29125  [ODFN-LD-6]  34.04,66.8 0 top
U21  ISL29125  [ODFN-LD-6]  52.32,66.8 0 top
U22  ISL29125  [ODFN-LD-6]  70.61,66.8 0 top
U23  ISL29125  [ODFN-LD-6]  88.9,66.8 0 top
U24  ISL29125  [ODFN-LD-6]  107.19,66.8 0 top
U25  ISL29125  [ODFN-LD-6]  15.75,83.82 0 top
U26  ISL29125  [ODFN-LD-6]  34.04,83.82 0 top
U27  ISL29125  [ODFN-LD-6]  52.32,83.82 0 top
U28  ISL29125  [ODFN-LD-6]  70.61,83.82 0 top
U29  ISL29125  [ODFN-LD-6]  88.9,83.82 0 top
U30  ISL29125  [ODFN-LD-6]  107.19,83.82 0 top
U31  ISL29125  [ODFN-LD-6]  15.75,100.84 0 top
U32  ISL29125  [ODFN-LD-6]  34.04,100.84 0 top
U33  ISL29125  [ODFN-LD-6]  52.32,100.84 0 top
U34  ISL29125  [ODFN-LD-6]  70.61,100.84 0 top
U35  ISL29125  [ODFN-LD-6]  88.9,100.84 0 top
U36  ISL29125  [ODFN-LD-6]  107.19,100.84 0 top

## Library data of the parts
C1 C3 C5 C7 C9 C11 C13 C15 C17 C19 C21 C23 C25 C27 C29 C31 C33 C35 C37 C39 C41 C43 C45 C47 C49 C51 C53 C55 C57 C59 C61 C63 C65 C67 C69 C71 = SparkFun-Capacitors; PROD_ID: CAP-00810
C2 C4 C6 C8 C10 C12 C14 C16 C18 C20 C22 C24 C26 C28 C30 C32 C34 C36 C38 C40 C42 C44 C46 C48 C50 C52 C54 C56 C58 C60 C62 C64 C66 C68 C70 C72 = SparkFun-Capacitors; PROD_ID: CAP-00868
E$1 = SparkFun-Retired
E$4 E$6 FID1-FID72 LOGO1-LOGO108 = SparkFun-Aesthetics
JP1-JP36 = SparkFun-Connectors
R1 R5 R9 R13 R17 R21 R25 R29 R33 R37 R41 R45 R49 R53 R57 R61 R65 R69 R73 R77 R81 R85 R89 R93 R97 R101 R105 R109 R113 R117 R121 R125 R129 R133 R137 R141 = SparkFun-Resistors; PROD_ID: RES-07863
R2-R4 R6-R8 R10-R12 R14-R16 R18-R20 R22-R24 R26-R28 R30-R32 R34-R36 R38-R40 R42-R44 R46-R48 R50-R52 R54-R56 R58-R60 R62-R64 R66-R68 R70-R72 R74-R76 R78-R80 R82-R84 R86-R88 R90-R92 R94-R96 R98-R100 R102-R104 R106-R108 R110-R112 R114-R116 R118-R120 R122-R124 R126-R128 R130-R132 R134-R136 R138-R140 R142-R144 = SparkFun-Resistors; PROD_ID: RES-00824
SJ1-SJ36 = SparkFun-Passives
STANDOFF1-STANDOFF72 = SparkFun-Electromechanical
U1-U36 = SparkFun-Sensors

## Nets
3.3V: JP1.2 R1.2 R4.2 SJ2.2
3.3V1: JP2.2 R5.2 R8.2 SJ1.2
3.3V2: JP3.2 R9.2 R12.2 SJ3.2
3.3V3: JP4.2 R13.2 R16.2 SJ4.2
3.3V4: JP5.2 R17.2 R20.2 SJ5.2
3.3V5: JP6.2 R21.2 R24.2 SJ6.2
3.3V6: JP7.2 R25.2 R28.2 SJ7.2
3.3V7: JP8.2 R29.2 R32.2 SJ8.2
3.3V8: JP9.2 R33.2 R36.2 SJ9.2
3.3V9: JP10.2 R37.2 R40.2 SJ10.2
3.3V10: JP11.2 R41.2 R44.2 SJ11.2
3.3V11: JP12.2 R45.2 R48.2 SJ12.2
3.3V12: JP13.2 R49.2 R52.2 SJ13.2
3.3V13: JP14.2 R53.2 R56.2 SJ14.2
3.3V14: JP15.2 R57.2 R60.2 SJ15.2
3.3V15: JP16.2 R61.2 R64.2 SJ16.2
3.3V16: JP17.2 R65.2 R68.2 SJ17.2
3.3V17: JP18.2 R69.2 R72.2 SJ18.2
3.3V18: JP19.2 R73.2 R76.2 SJ19.2
3.3V19: JP20.2 R77.2 R80.2 SJ20.2
3.3V20: JP21.2 R81.2 R84.2 SJ21.2
3.3V21: JP22.2 R85.2 R88.2 SJ22.2
3.3V22: JP23.2 R89.2 R92.2 SJ23.2
3.3V23: JP24.2 R93.2 R96.2 SJ24.2
3.3V24: JP25.2 R97.2 R100.2 SJ25.2
3.3V25: JP26.2 R101.2 R104.2 SJ26.2
3.3V26: JP27.2 R105.2 R108.2 SJ27.2
3.3V27: JP28.2 R109.2 R112.2 SJ28.2
3.3V28: JP29.2 R113.2 R116.2 SJ29.2
3.3V29: JP30.2 R117.2 R120.2 SJ30.2
3.3V30: JP31.2 R121.2 R124.2 SJ31.2
3.3V31: JP32.2 R125.2 R128.2 SJ32.2
3.3V32: JP33.2 R129.2 R132.2 SJ33.2
3.3V33: JP34.2 R133.2 R136.2 SJ34.2
3.3V34: JP35.2 R137.2 R140.2 SJ35.2
3.3V35: JP36.2 R141.2 R144.2 SJ36.2
!INT: JP1.5 R4.1 U1.5
!INT1: JP2.5 R8.1 U2.5
!INT2: JP3.5 R12.1 U3.5
!INT3: JP4.5 R16.1 U4.5
!INT4: JP5.5 R20.1 U5.5
!INT5: JP6.5 R24.1 U6.5
!INT6: JP7.5 R28.1 U7.5
!INT7: JP8.5 R32.1 U8.5
!INT8: JP9.5 R36.1 U9.5
!INT9: JP10.5 R40.1 U10.5
!INT10: JP11.5 R44.1 U11.5
!INT11: JP12.5 R48.1 U12.5
!INT12: JP13.5 R52.1 U13.5
!INT13: JP14.5 R56.1 U14.5
!INT14: JP15.5 R60.1 U15.5
!INT15: JP16.5 R64.1 U16.5
!INT16: JP17.5 R68.1 U17.5
!INT17: JP18.5 R72.1 U18.5
!INT18: JP19.5 R76.1 U19.5
!INT19: JP20.5 R80.1 U20.5
!INT20: JP21.5 R84.1 U21.5
!INT21: JP22.5 R88.1 U22.5
!INT22: JP23.5 R92.1 U23.5
!INT23: JP24.5 R96.1 U24.5
!INT24: JP25.5 R100.1 U25.5
!INT25: JP26.5 R104.1 U26.5
!INT26: JP27.5 R108.1 U27.5
!INT27: JP28.5 R112.1 U28.5
!INT28: JP29.5 R116.1 U29.5
!INT29: JP30.5 R120.1 U30.5
!INT30: JP31.5 R124.1 U31.5
!INT31: JP32.5 R128.1 U32.5
!INT32: JP33.5 R132.1 U33.5
!INT33: JP34.5 R136.1 U34.5
!INT34: JP35.5 R140.1 U35.5
!INT35: JP36.5 R144.1 U36.5
GND: C1.2 C2.2 JP1.1 U1.3
GND1: C3.2 C4.2 JP2.1 U2.3
GND2: C5.2 C6.2 JP3.1 U3.3
GND3: C7.2 C8.2 JP4.1 U4.3
GND4: C9.2 C10.2 JP5.1 U5.3
GND5: C11.2 C12.2 JP6.1 U6.3
GND6: C13.2 C14.2 JP7.1 U7.3
GND7: C15.2 C16.2 JP8.1 U8.3
GND8: C17.2 C18.2 JP9.1 U9.3
GND9: C19.2 C20.2 JP10.1 U10.3
GND10: C21.2 C22.2 JP11.1 U11.3
GND11: C23.2 C24.2 JP12.1 U12.3
GND12: C25.2 C26.2 JP13.1 U13.3
GND13: C27.2 C28.2 JP14.1 U14.3
GND14: C29.2 C30.2 JP15.1 U15.3
GND15: C31.2 C32.2 JP16.1 U16.3
GND16: C33.2 C34.2 JP17.1 U17.3
GND17: C35.2 C36.2 JP18.1 U18.3
GND18: C37.2 C38.2 JP19.1 U19.3
GND19: C39.2 C40.2 JP20.1 U20.3
GND20: C41.2 C42.2 JP21.1 U21.3
GND21: C43.2 C44.2 JP22.1 U22.3
GND22: C45.2 C46.2 JP23.1 U23.3
GND23: C47.2 C48.2 JP24.1 U24.3
GND24: C49.2 C50.2 JP25.1 U25.3
GND25: C51.2 C52.2 JP26.1 U26.3
GND26: C53.2 C54.2 JP27.1 U27.3
GND27: C55.2 C56.2 JP28.1 U28.3
GND28: C57.2 C58.2 JP29.1 U29.3
GND29: C59.2 C60.2 JP30.1 U30.3
GND30: C61.2 C62.2 JP31.1 U31.3
GND31: C63.2 C64.2 JP32.1 U32.3
GND32: C65.2 C66.2 JP33.1 U33.3
GND33: C67.2 C68.2 JP34.1 U34.3
GND34: C69.2 C70.2 JP35.1 U35.3
GND35: C71.2 C72.2 JP36.1 U36.3
N$1: C1.1 C2.1 R1.1 U1.1
N$2: C3.1 C4.1 R5.1 U2.1
N$3: R2.2 SJ2.3
N$4: R3.2 SJ2.1
N$5: R6.2 SJ1.3
N$6: R7.2 SJ1.1
N$7: C5.1 C6.1 R9.1 U3.1
N$8: R10.2 SJ3.3
N$9: R11.2 SJ3.1
N$10: C7.1 C8.1 R13.1 U4.1
N$11: R14.2 SJ4.3
N$12: R15.2 SJ4.1
N$13: C9.1 C10.1 R17.1 U5.1
N$14: R18.2 SJ5.3
N$15: R19.2 SJ5.1
N$16: C11.1 C12.1 R21.1 U6.1
N$17: R22.2 SJ6.3
N$18: R23.2 SJ6.1
N$19: C13.1 C14.1 R25.1 U7.1
N$20: R26.2 SJ7.3
N$21: R27.2 SJ7.1
N$22: C15.1 C16.1 R29.1 U8.1
N$23: R30.2 SJ8.3
N$24: R31.2 SJ8.1
N$25: C17.1 C18.1 R33.1 U9.1
N$26: R34.2 SJ9.3
N$27: R35.2 SJ9.1
N$28: C19.1 C20.1 R37.1 U10.1
N$29: R38.2 SJ10.3
N$30: R39.2 SJ10.1
N$31: C21.1 C22.1 R41.1 U11.1
N$32: R42.2 SJ11.3
N$33: R43.2 SJ11.1
N$34: C23.1 C24.1 R45.1 U12.1
N$35: R46.2 SJ12.3
N$36: R47.2 SJ12.1
N$37: C25.1 C26.1 R49.1 U13.1
N$38: R50.2 SJ13.3
N$39: R51.2 SJ13.1
N$40: C27.1 C28.1 R53.1 U14.1
N$41: R54.2 SJ14.3
N$42: R55.2 SJ14.1
N$43: C29.1 C30.1 R57.1 U15.1
N$44: R58.2 SJ15.3
N$45: R59.2 SJ15.1
N$46: C31.1 C32.1 R61.1 U16.1
N$47: R62.2 SJ16.3
N$48: R63.2 SJ16.1
N$49: C33.1 C34.1 R65.1 U17.1
N$50: R66.2 SJ17.3
N$51: R67.2 SJ17.1
N$52: C35.1 C36.1 R69.1 U18.1
N$53: R70.2 SJ18.3
N$54: R71.2 SJ18.1
N$55: C37.1 C38.1 R73.1 U19.1
N$56: R74.2 SJ19.3
N$57: R75.2 SJ19.1
N$58: C39.1 C40.1 R77.1 U20.1
N$59: R78.2 SJ20.3
N$60: R79.2 SJ20.1
N$61: C41.1 C42.1 R81.1 U21.1
N$62: R82.2 SJ21.3
N$63: R83.2 SJ21.1
N$64: C43.1 C44.1 R85.1 U22.1
N$65: R86.2 SJ22.3
N$66: R87.2 SJ22.1
N$67: C45.1 C46.1 R89.1 U23.1
N$68: R90.2 SJ23.3
N$69: R91.2 SJ23.1
N$70: C47.1 C48.1 R93.1 U24.1
N$71: R94.2 SJ24.3
N$72: R95.2 SJ24.1
N$73: C49.1 C50.1 R97.1 U25.1
N$74: R98.2 SJ25.3
N$75: R99.2 SJ25.1
N$76: C51.1 C52.1 R101.1 U26.1
N$77: R102.2 SJ26.3
N$78: R103.2 SJ26.1
N$79: C53.1 C54.1 R105.1 U27.1
N$80: R106.2 SJ27.3
N$81: R107.2 SJ27.1
N$82: C55.1 C56.1 R109.1 U28.1
N$83: R110.2 SJ28.3
N$84: R111.2 SJ28.1
N$85: C57.1 C58.1 R113.1 U29.1
N$86: R114.2 SJ29.3
N$87: R115.2 SJ29.1
N$88: C59.1 C60.1 R117.1 U30.1
N$89: R118.2 SJ30.3
N$90: R119.2 SJ30.1
N$91: C61.1 C62.1 R121.1 U31.1
N$92: R122.2 SJ31.3
N$93: R123.2 SJ31.1
N$94: C63.1 C64.1 R125.1 U32.1
N$95: R126.2 SJ32.3
N$96: R127.2 SJ32.1
N$97: C65.1 C66.1 R129.1 U33.1
N$98: R130.2 SJ33.3
N$99: R131.2 SJ33.1
N$100: C67.1 C68.1 R133.1 U34.1
N$101: R134.2 SJ34.3
N$102: R135.2 SJ34.1
N$103: C69.1 C70.1 R137.1 U35.1
N$104: R138.2 SJ35.3
N$105: R139.2 SJ35.1
N$106: C71.1 C72.1 R141.1 U36.1
N$107: R142.2 SJ36.3
N$108: R143.2 SJ36.1
SCL: JP1.4 R3.1 U1.6
SCL1: JP2.4 R7.1 U2.6
SCL2: JP3.4 R11.1 U3.6
SCL3: JP4.4 R15.1 U4.6
SCL4: JP5.4 R19.1 U5.6
SCL5: JP6.4 R23.1 U6.6
SCL6: JP7.4 R27.1 U7.6
SCL7: JP8.4 R31.1 U8.6
SCL8: JP9.4 R35.1 U9.6
SCL9: JP10.4 R39.1 U10.6
SCL10: JP11.4 R43.1 U11.6
SCL11: JP12.4 R47.1 U12.6
SCL12: JP13.4 R51.1 U13.6
SCL13: JP14.4 R55.1 U14.6
SCL14: JP15.4 R59.1 U15.6
SCL15: JP16.4 R63.1 U16.6
SCL16: JP17.4 R67.1 U17.6
SCL17: JP18.4 R71.1 U18.6
SCL18: JP19.4 R75.1 U19.6
SCL19: JP20.4 R79.1 U20.6
SCL20: JP21.4 R83.1 U21.6
SCL21: JP22.4 R87.1 U22.6
SCL22: JP23.4 R91.1 U23.6
SCL23: JP24.4 R95.1 U24.6
SCL24: JP25.4 R99.1 U25.6
SCL25: JP26.4 R103.1 U26.6
SCL26: JP27.4 R107.1 U27.6
SCL27: JP28.4 R111.1 U28.6
SCL28: JP29.4 R115.1 U29.6
SCL29: JP30.4 R119.1 U30.6
SCL30: JP31.4 R123.1 U31.6
SCL31: JP32.4 R127.1 U32.6
SCL32: JP33.4 R131.1 U33.6
SCL33: JP34.4 R135.1 U34.6
SCL34: JP35.4 R139.1 U35.6
SCL35: JP36.4 R143.1 U36.6
SDA: JP1.3 R2.1 U1.4
SDA1: JP2.3 R6.1 U2.4
SDA2: JP3.3 R10.1 U3.4
SDA3: JP4.3 R14.1 U4.4
SDA4: JP5.3 R18.1 U5.4
SDA5: JP6.3 R22.1 U6.4
SDA6: JP7.3 R26.1 U7.4
SDA7: JP8.3 R30.1 U8.4
SDA8: JP9.3 R34.1 U9.4
SDA9: JP10.3 R38.1 U10.4
SDA10: JP11.3 R42.1 U11.4
SDA11: JP12.3 R46.1 U12.4
SDA12: JP13.3 R50.1 U13.4
SDA13: JP14.3 R54.1 U14.4
SDA14: JP15.3 R58.1 U15.4
SDA15: JP16.3 R62.1 U16.4
SDA16: JP17.3 R66.1 U17.4
SDA17: JP18.3 R70.1 U18.4
SDA18: JP19.3 R74.1 U19.4
SDA19: JP20.3 R78.1 U20.4
SDA20: JP21.3 R82.1 U21.4
SDA21: JP22.3 R86.1 U22.4
SDA22: JP23.3 R90.1 U23.4
SDA23: JP24.3 R94.1 U24.4
SDA24: JP25.3 R98.1 U25.4
SDA25: JP26.3 R102.1 U26.4
SDA26: JP27.3 R106.1 U27.4
SDA27: JP28.3 R110.1 U28.4
SDA28: JP29.3 R114.1 U29.4
SDA29: JP30.3 R118.1 U30.4
SDA30: JP31.3 R122.1 U31.4
SDA31: JP32.3 R126.1 U32.4
SDA32: JP33.3 R130.1 U33.4
SDA33: JP34.3 R134.1 U34.4
SDA34: JP35.3 R138.1 U35.4
SDA35: JP36.3 R142.1 U36.4

## Tracks (layer width: path | path; a pad name or v marks a point on that pad's centre or on a via)
3.3V  (via drill 0.51)
  Top 0.203: JP1.2 13.21,12.57 12.57,13.21 R1.2 | R4.2 22.61,17.02 v23.11,16.51 | v22.23,10.03 21.46,10.03 20.83,10.67 v17.02,10.67
  Bottom 0.203: SJ2.2 23.11,10.92 v22.23,10.03 | v17.02,10.67 15.75,10.67 JP1.2 | SJ2.2 24.13,13.21 | 22.1,13.21 SJ2.2 | v23.11,16.51 23.11,16.13 22.61,15.62 22.61,14.61 23.11,14.1 SJ2.2
3.3V1  (via drill 0.51)
  Top 0.203: JP2.2 31.5,12.57 30.86,13.21 R5.2 | R8.2 40.89,17.02 v41.4,16.51 | v40.51,10.03 39.75,10.03 39.12,10.67 v35.31,10.67
  Bottom 0.203: SJ1.2 41.4,10.92 v40.51,10.03 | v35.31,10.67 34.04,10.67 JP2.2 | SJ1.2 42.42,13.21 | 40.39,13.21 SJ1.2 | v41.4,16.51 41.4,16.13 40.89,15.62 40.89,14.61 41.4,14.1 SJ1.2
3.3V2  (via drill 0.51)
  Top 0.203: JP3.2 49.78,12.57 49.15,13.21 R9.2 | R12.2 59.18,17.02 v59.69,16.51 | v58.8,10.03 58.04,10.03 57.4,10.67 v53.59,10.67
  Bottom 0.203: SJ3.2 59.69,10.92 v58.8,10.03 | v53.59,10.67 52.32,10.67 JP3.2 | SJ3.2 60.71,13.21 | 58.67,13.21 SJ3.2 | v59.69,16.51 59.69,16.13 59.18,15.62 59.18,14.61 59.69,14.1 SJ3.2
3.3V3  (via drill 0.51)
  Top 0.203: JP4.2 68.07,12.57 67.44,13.21 R13.2 | R16.2 77.47,17.02 v77.98,16.51 | v77.09,10.03 76.33,10.03 75.69,10.67 v71.88,10.67
  Bottom 0.203: SJ4.2 77.98,10.92 v77.09,10.03 | v71.88,10.67 70.61,10.67 JP4.2 | SJ4.2 78.99,13.21 | 76.96,13.21 SJ4.2 | v77.98,16.51 77.98,16.13 77.47,15.62 77.47,14.61 77.98,14.1 SJ4.2
3.3V4  (via drill 0.51)
  Top 0.203: JP5.2 86.36,12.57 85.72,13.21 R17.2 | R20.2 95.76,17.02 v96.27,16.51 | v95.38,10.03 94.61,10.03 93.98,10.67 v90.17,10.67
  Bottom 0.203: SJ5.2 96.27,10.92 v95.38,10.03 | v90.17,10.67 88.9,10.67 JP5.2 | SJ5.2 97.28,13.21 | 95.25,13.21 SJ5.2 | v96.27,16.51 96.27,16.13 95.76,15.62 95.76,14.61 96.27,14.1 SJ5.2
3.3V5  (via drill 0.51)
  Top 0.203: JP6.2 104.65,12.57 104.01,13.21 R21.2 | R24.2 114.05,17.02 v114.55,16.51 | v113.67,10.03 112.9,10.03 112.27,10.67 v108.46,10.67
  Bottom 0.203: SJ6.2 114.55,10.92 v113.67,10.03 | v108.46,10.67 107.19,10.67 JP6.2 | SJ6.2 115.57,13.21 | 113.54,13.21 SJ6.2 | v114.55,16.51 114.55,16.13 114.05,15.62 114.05,14.61 114.55,14.1 SJ6.2
3.3V6  (via drill 0.51)
  Top 0.203: JP7.2 13.21,29.59 12.57,30.23 R25.2 | R28.2 22.61,34.04 v23.11,33.53 | v22.23,27.05 21.46,27.05 20.83,27.69 v17.02,27.69
  Bottom 0.203: SJ7.2 23.11,27.94 v22.23,27.05 | v17.02,27.69 15.75,27.69 JP7.2 | SJ7.2 24.13,30.23 | 22.1,30.23 SJ7.2 | v23.11,33.53 23.11,33.15 22.61,32.64 22.61,31.62 23.11,31.11 SJ7.2
3.3V7  (via drill 0.51)
  Top 0.203: JP8.2 31.5,29.59 30.86,30.23 R29.2 | R32.2 40.89,34.04 v41.4,33.53 | v40.51,27.05 39.75,27.05 39.12,27.69 v35.31,27.69
  Bottom 0.203: SJ8.2 41.4,27.94 v40.51,27.05 | v35.31,27.69 34.04,27.69 JP8.2 | SJ8.2 42.42,30.23 | 40.39,30.23 SJ8.2 | v41.4,33.53 41.4,33.15 40.89,32.64 40.89,31.62 41.4,31.11 SJ8.2
3.3V8  (via drill 0.51)
  Top 0.203: JP9.2 49.78,29.59 49.15,30.23 R33.2 | R36.2 59.18,34.04 v59.69,33.53 | v58.8,27.05 58.04,27.05 57.4,27.69 v53.59,27.69
  Bottom 0.203: SJ9.2 59.69,27.94 v58.8,27.05 | v53.59,27.69 52.32,27.69 JP9.2 | SJ9.2 60.71,30.23 | 58.67,30.23 SJ9.2 | v59.69,33.53 59.69,33.15 59.18,32.64 59.18,31.62 59.69,31.11 SJ9.2
3.3V9  (via drill 0.51)
  Top 0.203: JP10.2 68.07,29.59 67.44,30.23 R37.2 | R40.2 77.47,34.04 v77.98,33.53 | v77.09,27.05 76.33,27.05 75.69,27.69 v71.88,27.69
  Bottom 0.203: SJ10.2 77.98,27.94 v77.09,27.05 | v71.88,27.69 70.61,27.69 JP10.2 | SJ10.2 78.99,30.23 | 76.96,30.23 SJ10.2 | v77.98,33.53 77.98,33.15 77.47,32.64 77.47,31.62 77.98,31.11 SJ10.2
3.3V10  (via drill 0.51)
  Top 0.203: JP11.2 86.36,29.59 85.72,30.23 R41.2 | R44.2 95.76,34.04 v96.27,33.53 | v95.38,27.05 94.61,27.05 93.98,27.69 v90.17,27.69
  Bottom 0.203: SJ11.2 96.27,27.94 v95.38,27.05 | v90.17,27.69 88.9,27.69 JP11.2 | SJ11.2 97.28,30.23 | 95.25,30.23 SJ11.2 | v96.27,33.53 96.27,33.15 95.76,32.64 95.76,31.62 96.27,31.11 SJ11.2
3.3V11  (via drill 0.51)
  Top 0.203: JP12.2 104.65,29.59 104.01,30.23 R45.2 | R48.2 114.05,34.04 v114.55,33.53 | v113.67,27.05 112.9,27.05 112.27,27.69 v108.46,27.69
  Bottom 0.203: SJ12.2 114.55,27.94 v113.67,27.05 | v108.46,27.69 107.19,27.69 JP12.2 | SJ12.2 115.57,30.23 | 113.54,30.23 SJ12.2 | v114.55,33.53 114.55,33.15 114.05,32.64 114.05,31.62 114.55,31.11 SJ12.2
3.3V12  (via drill 0.51)
  Top 0.203: JP13.2 13.21,46.61 12.57,47.24 R49.2 | R52.2 22.61,51.05 v23.11,50.55 | v22.23,44.07 21.46,44.07 20.83,44.7 v17.02,44.7
  Bottom 0.203: SJ13.2 23.11,44.96 v22.23,44.07 | v17.02,44.7 15.75,44.7 JP13.2 | SJ13.2 24.13,47.24 | 22.1,47.24 SJ13.2 | v23.11,50.55 23.11,50.16 22.61,49.66 22.61,48.64 23.11,48.13 SJ13.2
3.3V13  (via drill 0.51)
  Top 0.203: JP14.2 31.5,46.61 30.86,47.24 R53.2 | R56.2 40.89,51.05 v41.4,50.55 | v40.51,44.07 39.75,44.07 39.12,44.7 v35.31,44.7
  Bottom 0.203: SJ14.2 41.4,44.96 v40.51,44.07 | v35.31,44.7 34.04,44.7 JP14.2 | SJ14.2 42.42,47.24 | 40.39,47.24 SJ14.2 | v41.4,50.55 41.4,50.16 40.89,49.66 40.89,48.64 41.4,48.13 SJ14.2
3.3V14  (via drill 0.51)
  Top 0.203: JP15.2 49.78,46.61 49.15,47.24 R57.2 | R60.2 59.18,51.05 v59.69,50.55 | v58.8,44.07 58.04,44.07 57.4,44.7 v53.59,44.7
  Bottom 0.203: SJ15.2 59.69,44.96 v58.8,44.07 | v53.59,44.7 52.32,44.7 JP15.2 | SJ15.2 60.71,47.24 | 58.67,47.24 SJ15.2 | v59.69,50.55 59.69,50.16 59.18,49.66 59.18,48.64 59.69,48.13 SJ15.2
3.3V15  (via drill 0.51)
  Top 0.203: JP16.2 68.07,46.61 67.44,47.24 R61.2 | R64.2 77.47,51.05 v77.98,50.55 | v77.09,44.07 76.33,44.07 75.69,44.7 v71.88,44.7
  Bottom 0.203: SJ16.2 77.98,44.96 v77.09,44.07 | v71.88,44.7 70.61,44.7 JP16.2 | SJ16.2 78.99,47.24 | 76.96,47.24 SJ16.2 | v77.98,50.55 77.98,50.16 77.47,49.66 77.47,48.64 77.98,48.13 SJ16.2
3.3V16  (via drill 0.51)
  Top 0.203: JP17.2 86.36,46.61 85.72,47.24 R65.2 | R68.2 95.76,51.05 v96.27,50.55 | v95.38,44.07 94.61,44.07 93.98,44.7 v90.17,44.7
  Bottom 0.203: SJ17.2 96.27,44.96 v95.38,44.07 | v90.17,44.7 88.9,44.7 JP17.2 | SJ17.2 97.28,47.24 | 95.25,47.24 SJ17.2 | v96.27,50.55 96.27,50.16 95.76,49.66 95.76,48.64 96.27,48.13 SJ17.2
3.3V17  (via drill 0.51)
  Top 0.203: JP18.2 104.65,46.61 104.01,47.24 R69.2 | R72.2 114.05,51.05 v114.55,50.55 | v113.67,44.07 112.9,44.07 112.27,44.7 v108.46,44.7
  Bottom 0.203: SJ18.2 114.55,44.96 v113.67,44.07 | v108.46,44.7 107.19,44.7 JP18.2 | SJ18.2 115.57,47.24 | 113.54,47.24 SJ18.2 | v114.55,50.55 114.55,50.16 114.05,49.66 114.05,48.64 114.55,48.13 SJ18.2
3.3V18  (via drill 0.51)
  Top 0.203: JP19.2 13.21,63.63 12.57,64.26 R73.2 | R76.2 22.61,68.07 v23.11,67.56 | v22.23,61.09 21.46,61.09 20.83,61.72 v17.02,61.72
  Bottom 0.203: SJ19.2 23.11,61.98 v22.23,61.09 | v17.02,61.72 15.75,61.72 JP19.2 | SJ19.2 24.13,64.26 | 22.1,64.26 SJ19.2 | v23.11,67.56 23.11,67.18 22.61,66.67 22.61,65.66 23.11,65.15 SJ19.2
3.3V19  (via drill 0.51)
  Top 0.203: JP20.2 31.5,63.63 30.86,64.26 R77.2 | R80.2 40.89,68.07 v41.4,67.56 | v40.51,61.09 39.75,61.09 39.12,61.72 v35.31,61.72
  Bottom 0.203: SJ20.2 41.4,61.98 v40.51,61.09 | v35.31,61.72 34.04,61.72 JP20.2 | SJ20.2 42.42,64.26 | 40.39,64.26 SJ20.2 | v41.4,67.56 41.4,67.18 40.89,66.67 40.89,65.66 41.4,65.15 SJ20.2
3.3V20  (via drill 0.51)
  Top 0.203: JP21.2 49.78,63.63 49.15,64.26 R81.2 | R84.2 59.18,68.07 v59.69,67.56 | v58.8,61.09 58.04,61.09 57.4,61.72 v53.59,61.72
  Bottom 0.203: SJ21.2 59.69,61.98 v58.8,61.09 | v53.59,61.72 52.32,61.72 JP21.2 | SJ21.2 60.71,64.26 | 58.67,64.26 SJ21.2 | v59.69,67.56 59.69,67.18 59.18,66.67 59.18,65.66 59.69,65.15 SJ21.2
3.3V21  (via drill 0.51)
  Top 0.203: JP22.2 68.07,63.63 67.44,64.26 R85.2 | R88.2 77.47,68.07 v77.98,67.56 | v77.09,61.09 76.33,61.09 75.69,61.72 v71.88,61.72
  Bottom 0.203: SJ22.2 77.98,61.98 v77.09,61.09 | v71.88,61.72 70.61,61.72 JP22.2 | SJ22.2 78.99,64.26 | 76.96,64.26 SJ22.2 | v77.98,67.56 77.98,67.18 77.47,66.67 77.47,65.66 77.98,65.15 SJ22.2
3.3V22  (via drill 0.51)
  Top 0.203: JP23.2 86.36,63.63 85.72,64.26 R89.2 | R92.2 95.76,68.07 v96.27,67.56 | v95.38,61.09 94.61,61.09 93.98,61.72 v90.17,61.72
  Bottom 0.203: SJ23.2 96.27,61.98 v95.38,61.09 | v90.17,61.72 88.9,61.72 JP23.2 | SJ23.2 97.28,64.26 | 95.25,64.26 SJ23.2 | v96.27,67.56 96.27,67.18 95.76,66.67 95.76,65.66 96.27,65.15 SJ23.2
3.3V23  (via drill 0.51)
  Top 0.203: JP24.2 104.65,63.63 104.01,64.26 R93.2 | R96.2 114.05,68.07 v114.55,67.56 | v113.67,61.09 112.9,61.09 112.27,61.72 v108.46,61.72
  Bottom 0.203: SJ24.2 114.55,61.98 v113.67,61.09 | v108.46,61.72 107.19,61.72 JP24.2 | SJ24.2 115.57,64.26 | 113.54,64.26 SJ24.2 | v114.55,67.56 114.55,67.18 114.05,66.67 114.05,65.66 114.55,65.15 SJ24.2
3.3V24  (via drill 0.51)
  Top 0.203: JP25.2 13.21,80.64 12.57,81.28 R97.2 | R100.2 22.61,85.09 v23.11,84.58 | v22.23,78.11 21.46,78.11 20.83,78.74 v17.02,78.74
  Bottom 0.203: SJ25.2 23.11,78.99 v22.23,78.11 | v17.02,78.74 15.75,78.74 JP25.2 | SJ25.2 24.13,81.28 | 22.1,81.28 SJ25.2 | v23.11,84.58 23.11,84.2 22.61,83.69 22.61,82.68 23.11,82.17 SJ25.2
3.3V25  (via drill 0.51)
  Top 0.203: JP26.2 31.5,80.64 30.86,81.28 R101.2 | R104.2 40.89,85.09 v41.4,84.58 | v40.51,78.11 39.75,78.11 39.12,78.74 v35.31,78.74
  Bottom 0.203: SJ26.2 41.4,78.99 v40.51,78.11 | v35.31,78.74 34.04,78.74 JP26.2 | SJ26.2 42.42,81.28 | 40.39,81.28 SJ26.2 | v41.4,84.58 41.4,84.2 40.89,83.69 40.89,82.68 41.4,82.17 SJ26.2
3.3V26  (via drill 0.51)
  Top 0.203: JP27.2 49.78,80.64 49.15,81.28 R105.2 | R108.2 59.18,85.09 v59.69,84.58 | v58.8,78.11 58.04,78.11 57.4,78.74 v53.59,78.74
  Bottom 0.203: SJ27.2 59.69,78.99 v58.8,78.11 | v53.59,78.74 52.32,78.74 JP27.2 | SJ27.2 60.71,81.28 | 58.67,81.28 SJ27.2 | v59.69,84.58 59.69,84.2 59.18,83.69 59.18,82.68 59.69,82.17 SJ27.2
3.3V27  (via drill 0.51)
  Top 0.203: JP28.2 68.07,80.64 67.44,81.28 R109.2 | R112.2 77.47,85.09 v77.98,84.58 | v77.09,78.11 76.33,78.11 75.69,78.74 v71.88,78.74
  Bottom 0.203: SJ28.2 77.98,78.99 v77.09,78.11 | v71.88,78.74 70.61,78.74 JP28.2 | SJ28.2 78.99,81.28 | 76.96,81.28 SJ28.2 | v77.98,84.58 77.98,84.2 77.47,83.69 77.47,82.68 77.98,82.17 SJ28.2
3.3V28  (via drill 0.51)
  Top 0.203: JP29.2 86.36,80.64 85.72,81.28 R113.2 | R116.2 95.76,85.09 v96.27,84.58 | v95.38,78.11 94.61,78.11 93.98,78.74 v90.17,78.74
  Bottom 0.203: SJ29.2 96.27,78.99 v95.38,78.11 | v90.17,78.74 88.9,78.74 JP29.2 | SJ29.2 97.28,81.28 | 95.25,81.28 SJ29.2 | v96.27,84.58 96.27,84.2 95.76,83.69 95.76,82.68 96.27,82.17 SJ29.2
3.3V29  (via drill 0.51)
  Top 0.203: JP30.2 104.65,80.64 104.01,81.28 R117.2 | R120.2 114.05,85.09 v114.55,84.58 | v113.67,78.11 112.9,78.11 112.27,78.74 v108.46,78.74
  Bottom 0.203: SJ30.2 114.55,78.99 v113.67,78.11 | v108.46,78.74 107.19,78.74 JP30.2 | SJ30.2 115.57,81.28 | 113.54,81.28 SJ30.2 | v114.55,84.58 114.55,84.2 114.05,83.69 114.05,82.68 114.55,82.17 SJ30.2
3.3V30  (via drill 0.51)
  Top 0.203: JP31.2 13.21,97.66 12.57,98.3 R121.2 | R124.2 22.61,102.11 v23.11,101.6 | v22.23,95.12 21.46,95.12 20.83,95.76 v17.02,95.76
  Bottom 0.203: SJ31.2 23.11,96.01 v22.23,95.12 | v17.02,95.76 15.75,95.76 JP31.2 | SJ31.2 24.13,98.3 | 22.1,98.3 SJ31.2 | v23.11,101.6 23.11,101.22 22.61,100.71 22.61,99.69 23.11,99.19 SJ31.2
3.3V31  (via drill 0.51)
  Top 0.203: JP32.2 31.5,97.66 30.86,98.3 R125.2 | R128.2 40.89,102.11 v41.4,101.6 | v40.51,95.12 39.75,95.12 39.12,95.76 v35.31,95.76
  Bottom 0.203: SJ32.2 41.4,96.01 v40.51,95.12 | v35.31,95.76 34.04,95.76 JP32.2 | SJ32.2 42.42,98.3 | 40.39,98.3 SJ32.2 | v41.4,101.6 41.4,101.22 40.89,100.71 40.89,99.69 41.4,99.19 SJ32.2
3.3V32  (via drill 0.51)